# EAGLE board pCog101_Wifi_Remote_TFT (EAGLE 6.6.0)
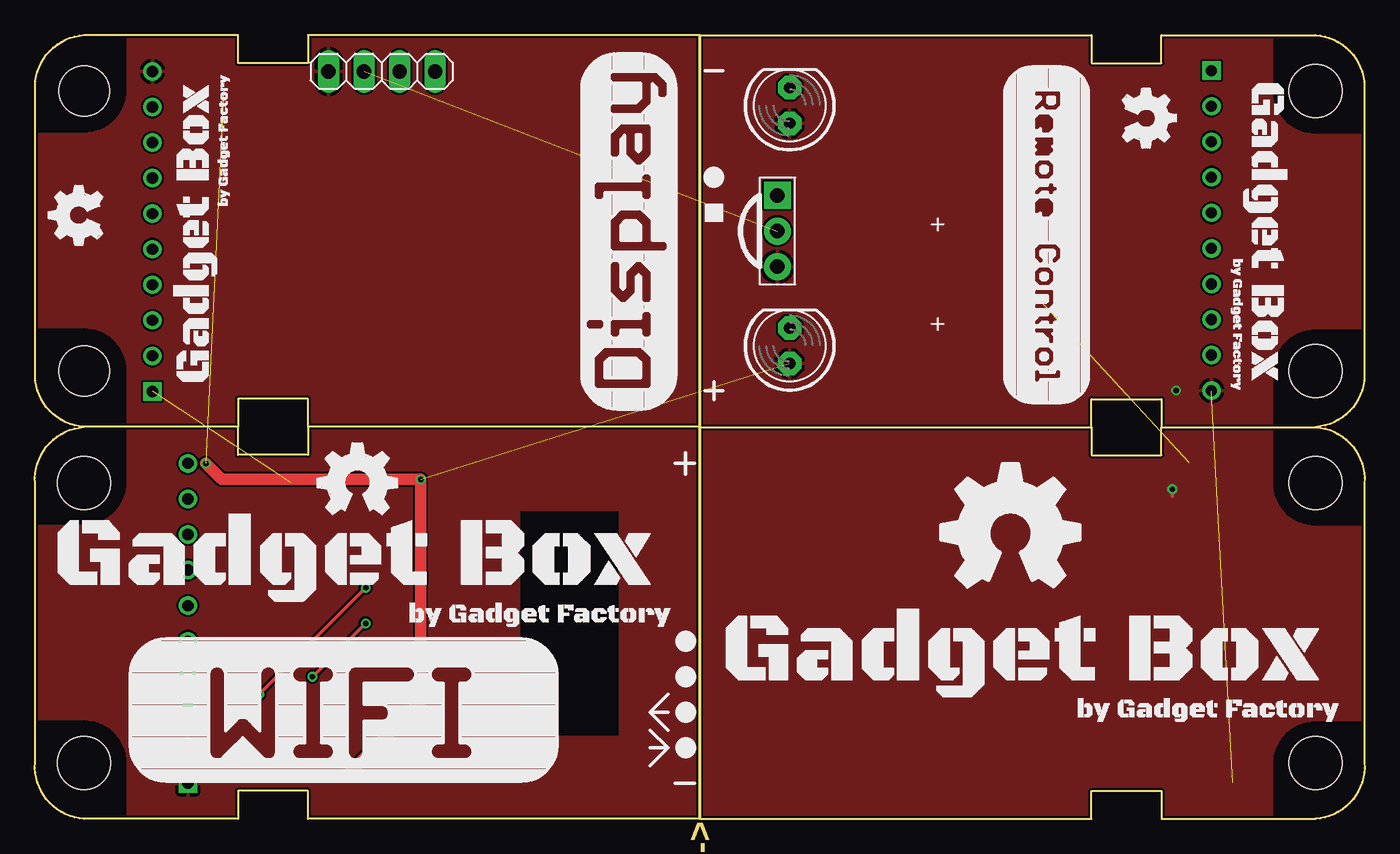
[diagram p0: board, top side]
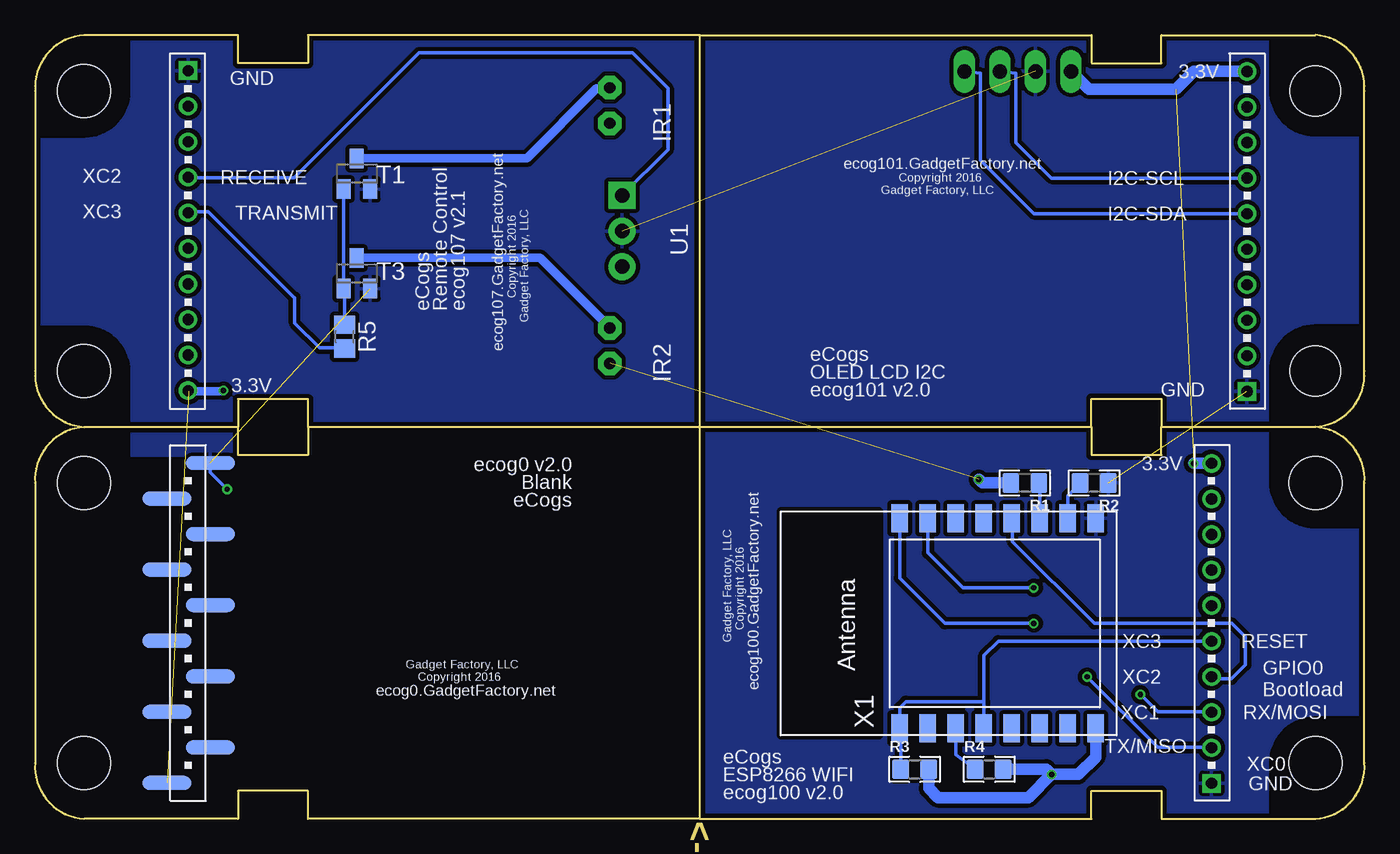
[diagram p1: board, bottom side, seen from below]

Size 95.01 x 56 mm. Coordinates in mm from the lower left corner, seen from the top.
Copper layers (1*16): Top 0.035mm / dielectric 1.5mm / Bottom 0.035mm
Design rules "hackvana": minimum track width 6mil, minimum drill 0.3mm, track to track 6mil, track to pad 6mil, pad to pad 6mil, via to via 6mil, smd to smd 0mil, copper to edge 6mil, drill to drill 6mil, minimum pad ring 10mil, minimum via ring 6mil, stop-mask expansion 2mil, vias tented up to drill 100mil, thermal gap 10mil

## Footprints (pad centres in the part's own frame; a part is rotated, then mirrored left to right if it is on the bottom)
ECOG_GENERAL_TH = drill 0.8: 3V3 11.43,25.4; G0 11.43,5.08; G1 11.43,7.62; G2 11.43,10.16; G3 11.43,12.7; G4 11.43,15.24; G5 11.43,17.78; G6 11.43,20.32; G7 11.43,22.86 | drill 0.8 square: GND 11.43,2.54 | hole 3.8: 4,24; 4,4
ECOG_GENERAL_SMD = smd 3.5 x 1 bottom: 3V3 9.923,25.429; G0 9.923,5.111; G1 13.022,7.649; G2 9.923,10.189; G3 13.022,12.729; G4 9.923,15.269; G5 13.022,17.809; G6 9.923,20.349; G7 13.022,22.889; GND 13.022,2.571 | hole 3.8: 4,24; 4,4
ECOG_BUSES_TH = drill 0.8: 3V3 8.89,25.4; 5V0 8.89,22.86; I2C-SCL 8.89,17.78; I2C-SDA 8.89,15.24; RESET 8.89,20.32; SPI-CS 8.89,12.7; SPI-MISO 8.89,5.08; SPI-MOSI 8.89,7.62; SPI-SCK 8.89,10.16 | drill 0.8 square: GND 8.89,2.54 | hole 3.6: 4.004,24.003; 4.004,4.003
LED5MM = drill 0.813 pad 1.676 octagon: A -1.27,0; K 1.27,0
1X04 = drill 1.016 long: 1 -3.81,0; 2 -1.27,0; 3 1.27,0; 4 3.81,0
0805 = smd 1.2 x 1.4: 1 -1,0; 2 1,0
R0805 = smd 1.3 x 1.5: 1 -0.85,0; 2 0.85,0
SOT23-BEC = smd 1 x 1.4: B -0.95,-1.1; C 0,1.1; E 0.95,-1.1
PNA460XM = drill 1.016 pad 1.93 square: 1 -2.54,0 | drill 1.016 pad 1.93: 2 0,0; 3 2.54,0
ESP-12 = smd 2 x 1.2: 1 -7.5,4.5; 2 -7.5,2.5; 3 -7.5,0.5; 4 -7.5,-1.5; 5 -7.5,-3.5; 6 -7.5,-5.5; 7 -7.5,-7.5; 8 -7.5,-9.5; 9 7.5,-9.5; 10 7.5,-7.5; 11 7.5,-5.5; 12 7.5,-3.5; 13 7.5,-1.5; 14 7.5,0.5; 15 7.5,2.5; 16 7.5,4.5

## Placement (x,y rotation side)
ECOG  ECOG_GENERAL_ROWTHROUGHOLE  [ECOG_GENERAL_TH]  -0.49,0 0 top
ECOG1  ECOG_GENERAL_ROWSURFACEMOUNT  [ECOG_GENERAL_SMD]  95.51,28 180 top
ECOG2  ECOG_BUSES_ROWTHROUGHHOLE  [ECOG_BUSES_TH]  -0.49,28 0 top
ECOG3  ECOG_GENERAL_ROWTHROUGHOLE  [ECOG_GENERAL_TH]  95.51,56 180 top
IR1  [LED5MM]  53.93,50.97 90 top
IR2  [LED5MM]  53.93,33.81 90 top
JP1  .96 I2C OLED LCD  [1X04]  24.78,53.4 0 top
R1  10K  [0805]  24.27,24 180 bottom
R2  10K  [0805]  19.32,24 180 bottom
R3  10K  [0805]  32.15,3.56 0 bottom
R4  10K  [0805]  26.81,3.56 0 bottom
R5  1.0 K  [R0805]  72.88,34.46 90 bottom
T1  MMBT3904LT1G  [SOT23-BEC]  72.01,46.09 0 bottom
T3  MMBT3904LT1G  [SOT23-BEC]  72.01,38.98 0 bottom
U1  PNA460XM  [PNA460XM]  53.05,42 270 top
U$1  [GADGETBOX_TEXT]  22.89,18.44 0 top
U$2  [LEGEND_DIO]  46.5,12.7 0 top
U$3  [LEGEND_DIO]  46.5,10.16 0 top
U$4  [LEGEND_DIO]  46.5,7.62 0 top
U$5  [LEGEND_DIO]  46.5,5.08 0 top
U$6  [OSHW_FILLX200_NOTEXT]  20.2,21.76 0 top
U$7  [GADGETBOX_TEXT]  70.64,11.64 0 top
U$8  [OSHW_FILLX350_NOTEXT]  64.75,16.54 0 top
U$9  [GADGETBOX_SMALL]  11.53,41.9 90 top
U$10  [OSHW_FILLX150_NOTEXT]  4.81,41 90 top
U$11  [GADGETBOX_SMALL]  87.86,41.87 270 top
U$12  [OSHW_FILLX150_NOTEXT]  77.73,52.19 270 top
U$13  [LEGEND_PWM]  48.52,43.3 180 top
U$14  [LEGEND_DIO]  48.52,45.84 180 top
X1  [ESP-12]  28.72,13.97 90 bottom

## Library data of the parts
ECOG ECOG2 ECOG3 U$2-U$5 U$13 U$14 = eCogs
ECOG1 = eCogs; DIGIKEY: S1013EC-10-ND
IR1 = adafruit; DIGIKEY: 1080-1082-ND
IR2 = adafruit; DIGIKEY: 1080-1080-ND
JP1 = pinhead; DEALEXTREME: 419232
R1-R4 = GadgetFactory; DIGIKEY: RMCF0805JT10K0CT-ND
R5 = rcl-ez; DIGIKEY: 311-1.0KARCT-ND
T1 T3 = transistor; DIGIKEY: MMBT3904LT1GOSCT-ND
U1 = adafruit; DIGIKEY: 751-1227-ND
U$1 U$7 U$9 U$11 = GadgetFactory
U$6 U$8 U$10 U$12 = ohw-logo
X1 = adafruit; ADAFRUIT: 2491

## Nets
3V3: ECOG1.3V3 ECOG2.3V3 ECOG3.3V3 ECOG.3V3 IR1.A IR2.A JP1.1 R1.2 R3.2 R4.2 U1.3 X1.8
GND: ECOG1.GND ECOG2.GND ECOG3.GND ECOG.GND JP1.2 R2.1 T1.E T3.E U1.2 X1.9
GPIO0/BOOTLOAD: ECOG.G2 X1.12
N$1: ECOG2.I2C-SCL JP1.3
N$2: ECOG2.I2C-SDA JP1.4
N$3: R1.1 X1.11
N$4: R2.2 X1.10
N$5: R4.1 X1.3
N$7: IR1.K T1.C
N$9: IR2.K T3.C
N$10: R5.2 T1.B T3.B
RECEIVE: ECOG3.G2 U1.1
RESET: ECOG.G3 R3.1 X1.1 X1.4
RX/MOSI: ECOG.G1 X1.15
TRANSMIT: ECOG3.G3 R5.1
TX/MISO: ECOG.G0 X1.16

## Tracks (layer width: path | path; a pad name or v marks a point on that pad's centre or on a via)
3V3  (via drill 0.38)  (3 unrouted)
  Top 0.813: v22.37,3.18 27.57,8.38 v27.57,24.26 13.35,24.26 v12.21,25.4
  Bottom 0.61: v81.54,30.6 81.56,30.57 84.05,30.57 ECOG3.3V3
  Bottom 0.813: 19.13,6.38 X1.8 19.22,4.42 20.46,3.18 v22.37,3.18 | R4.2 22.75,3.56 v22.37,3.18 | R3.2 31.15,2.18 30.5,1.53 24.02,1.53 v22.37,3.18 | R1.2 27.32,24 v27.57,24.26 | v12.21,25.4 ECOG.3V3 | JP1.1 19.7,52.13 13.48,52.13 12.21,53.4 ECOG2.3V3
  pour Top: -1.76,57.27 48.78,57.27 48.78,26.73 -1.76,26.73
  pour Top: 96.51,27 46.51,27 46.51,57 96.51,57
GND  (via drill 0.38)  (3 unrouted)
  Top 0.254: v81.28,23.55 81.28,23.05
  Bottom 0.254: ECOG1.GND 82.48,24.76 v81.28,23.55
  pour Bottom (isolate 0.305): -0.49,28 47.51,28 47.51,0 -0.49,0
  pour Top: -0.49,27.94 47.77,27.94 47.77,0 -0.49,0
  pour Top: 96.51,-1 46.51,-1 46.51,29 96.51,29
  pour Bottom (isolate 0.305): -3.03,58.54 50.05,58.54 50.05,25.46 -3.03,25.46
  pour Bottom (isolate 0.305): 97.51,26 45.51,26 45.51,58 97.51,58
GPIO0/BOOTLOAD
  Bottom 0.254: X1.12 25.16,21.42 25.16,19.81 19.32,13.97 9.48,13.97 8.51,13 8.51,11 9.51,10 10.78,10 ECOG.G2
N$1
  Bottom 0.254: JP1.3 24.91,53.27 24.91,48.32 22.37,45.78 ECOG2.I2C-SCL
N$2
  Bottom 0.254: JP1.4 27.45,53.27 27.45,47.05 23.64,43.24 ECOG2.I2C-SDA
N$3
  Bottom 0.254: X1.11 23.22,23.95 R1.1
N$4
  Bottom 0.254: X1.10 21.22,23.11 R2.2
N$5
  Bottom 0.254: X1.3 29.22,4.58 R4.1
N$7
  Bottom 0.61: T1.C 59.86,47.19 54.87,52.19 53.98,52.19 IR1.K
N$9
  Bottom 0.61: T3.C 58.94,40.08 IR2.K
N$10
  Bottom 0.254: R5.2 72.88,37.81 T3.B T1.B
RECEIVE
  Bottom 0.254: U1.1 49.79,47.8 49.79,52.19 52.33,54.73 67.57,54.73 76.48,45.81 84.05,45.81 ECOG3.G2
RESET
  Bottom 0.254: 27.19,8.38 27.19,6.5 X1.4 | R3.1 33.15,6.4 X1.1 33.22,7.95 32.78,8.38 27.19,8.38 | 27.19,8.38 27.19,11.69 26.18,12.7 ECOG.G3
RX/MOSI  (via drill 0.38)
  Top 0.254: v16.02,8.89 v23.64,16.51
  Bottom 0.254: 31.26,21.51 X1.15 31.22,19.01 28.72,16.51 v23.64,16.51 | v16.02,8.89 14.78,7.65 10.97,7.65 ECOG.G1
TRANSMIT
  Bottom 0.254: R5.1 72.92,33.65 74.68,33.65 76.46,35.43 76.46,37.24 76.5,37.24 82.63,43.38 84,43.38 ECOG3.G3
TX/MISO  (via drill 0.38)
  Top 0.254: v19.83,10.16 v23.64,13.97
  Bottom 0.254: 33.04,21.65 X1.16 33.22,17.2 29.99,13.97 v23.64,13.97 | v19.83,10.16 14.78,5.11 10.97,5.11 ECOG.G0

## Text on the board
Dimension: <----vScore | <----vScore | vScore----> | vScore---->
tPlace: + | +
bPlace: 3.3V | GND | Copyright 2016 | ecog101.GadgetFactory.net | RECEIVE | XC2 | I2C-SCL | Gadget Factory, LLC | TRANSMIT | XC3 | I2C-SDA | Copyright 2016 | ecog107 v2.1 | Remote Control | eCogs | Gadget Factory, LLC | eCogs | ecog107.GadgetFactory.net | OLED LCD I2C | 3.3V | GND | ecog101 v2.0 | ecog0 v2.0 | 3.3V | Blank | ecog100.GadgetFactory.net | eCogs | Gadget Factory, LLC | Copyright 2016 | RESET | XC3 | Gadget Factory, LLC | XC2 | ecog0.GadgetFactory.net | Copyright 2016 | GPIO0 / Bootload | RX/MOSI | XC1 | TX/MISO | eCogs | XC0 | ESP8266 WIFI | GND | ecog100 v2.0